# Altium PCB PCB_V1.PcbDoc
Units mm, origin at the board's own origin, x right, y up, seen from the top; angles counter-clockwise.
Board outline 80 x 47 mm, 2 copper layers (Top Layer, Bottom Layer), stack 1.991 mm thick; 66 components, 34 nets, 194 pads, 276 vias.
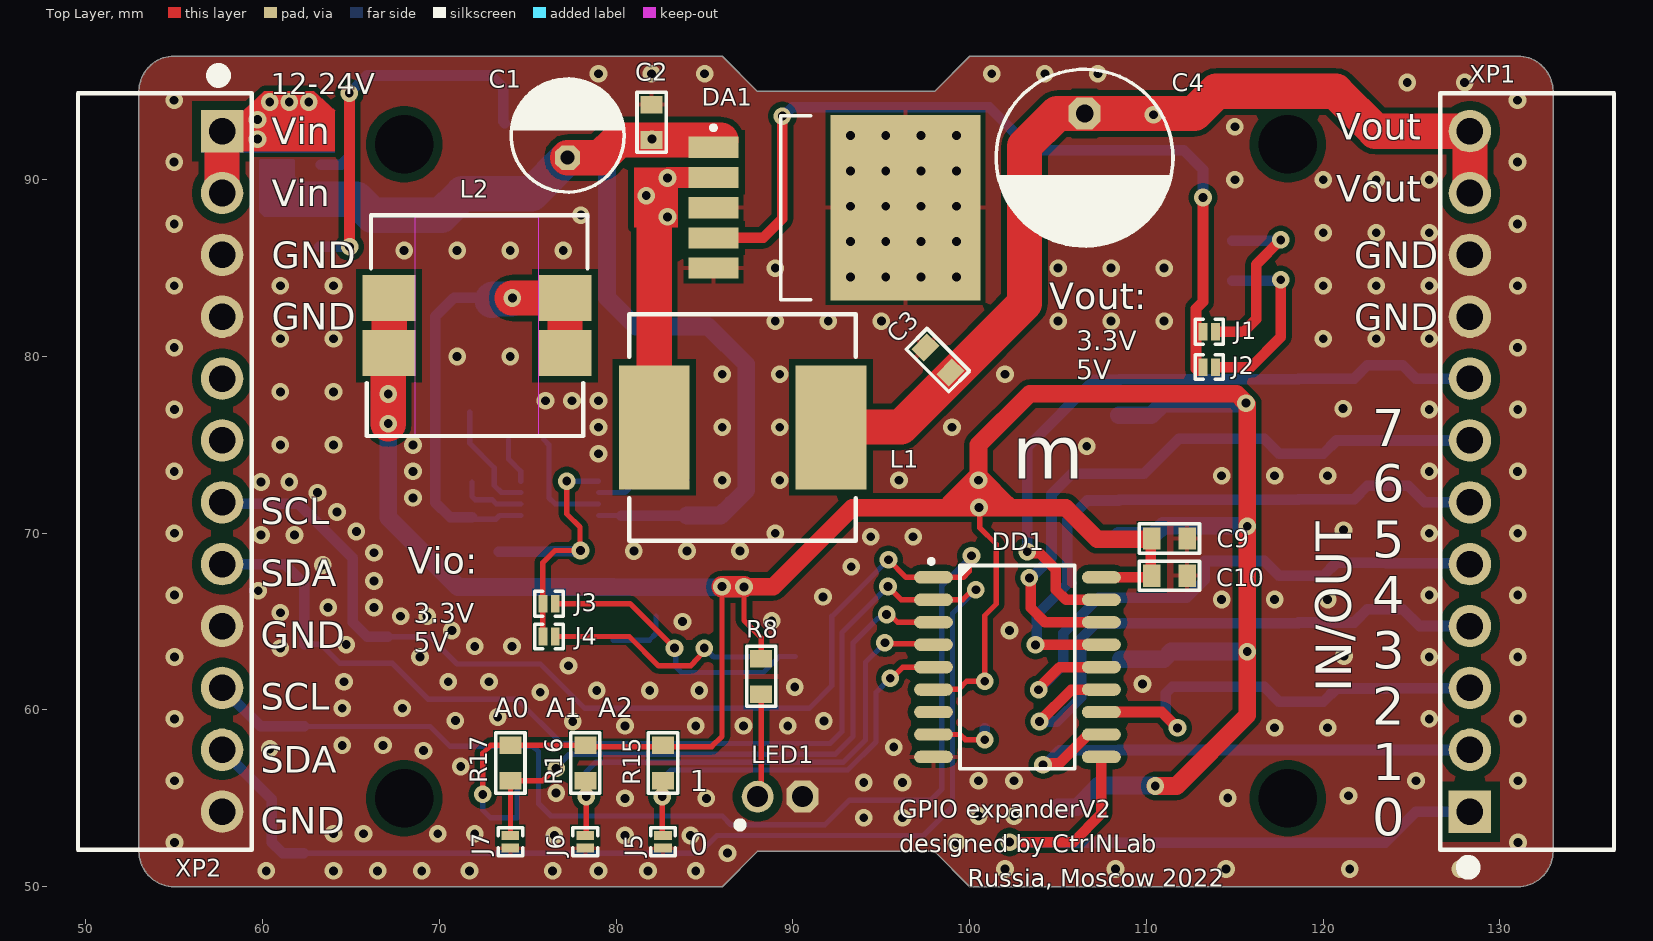
[diagram p0: Top Layer view]
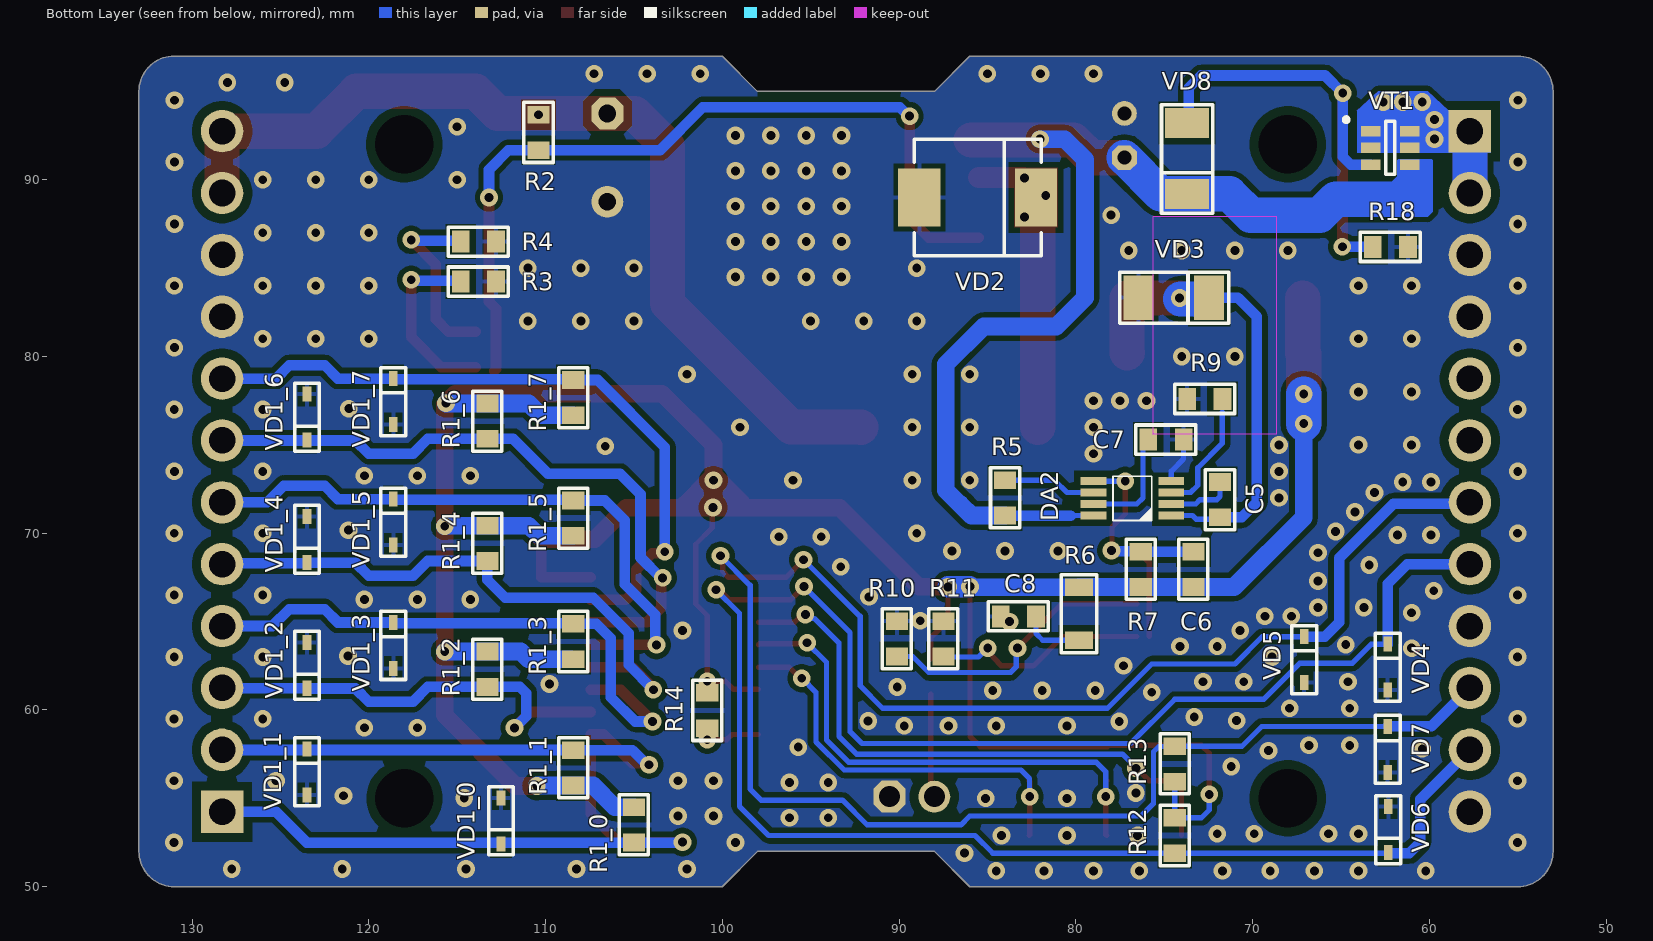
[diagram p1: Bottom Layer view, seen from below]
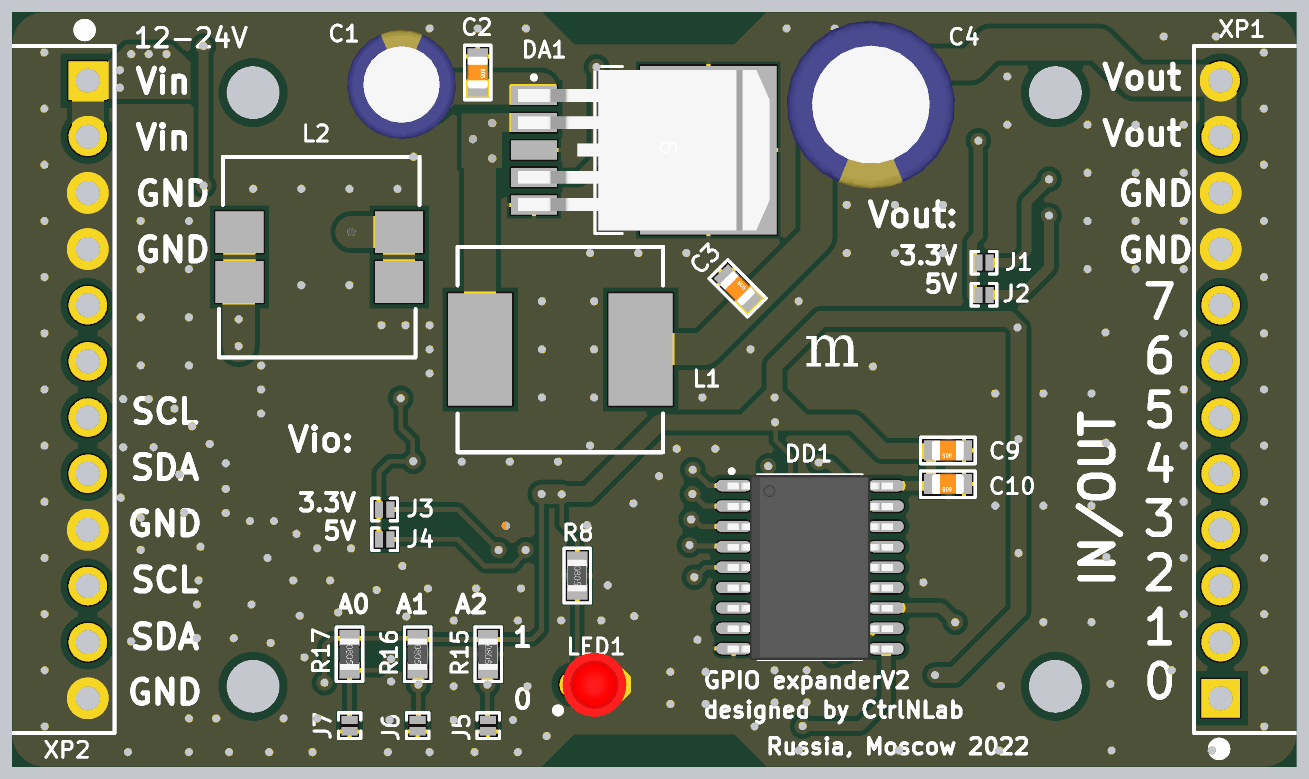
[diagram p2: 3D render of the assembled board from above, using the file's embedded part models]
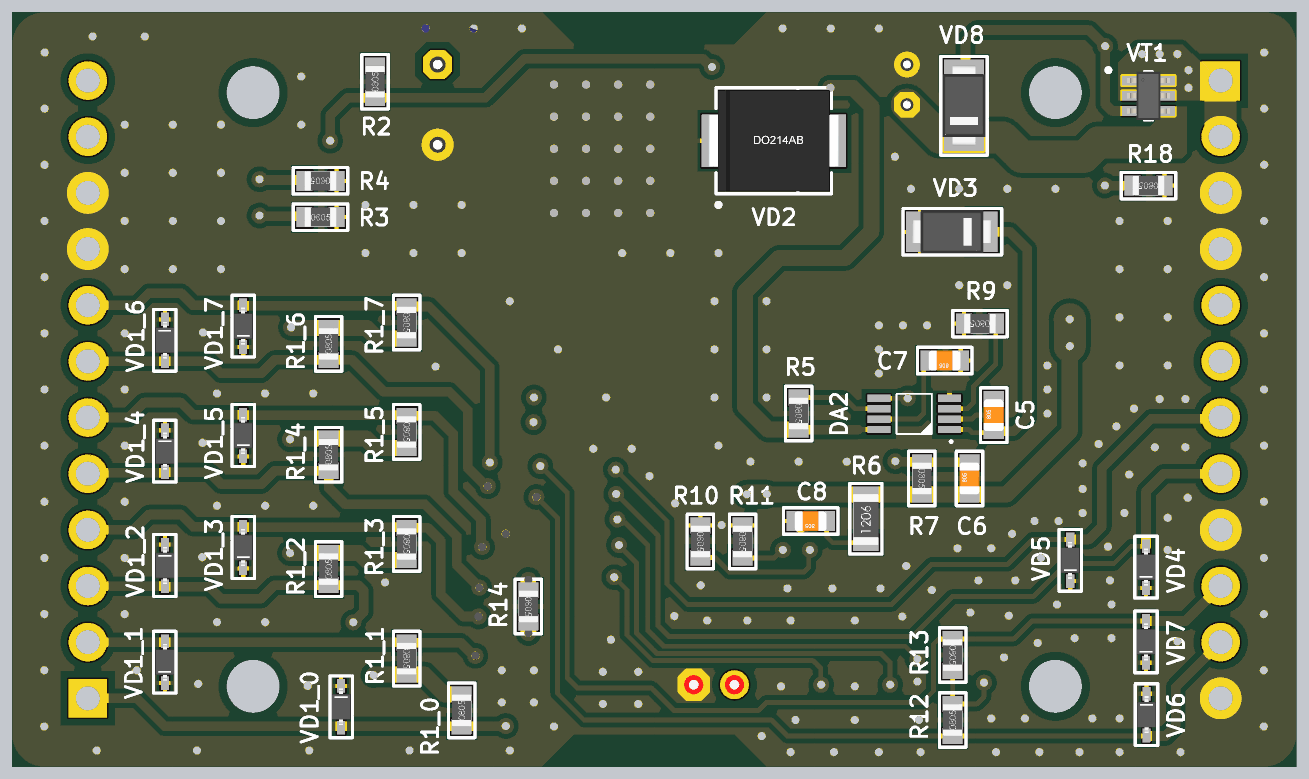
[diagram p3: 3D render of the assembled board from below, using the file's embedded part models]

## Layer stack, top to bottom
Top Solder: solder mask 0.0102, Solder Resist, Dk 3.5
Top Layer: signal copper 0.0356
Dielectric 1: dielectric 1.92, FR-4, Dk 4.8
Bottom Layer: signal copper 0.0356
Bottom Solder: solder mask 0.0102, Solder Resist, Dk 3.5

## Board outline
53,52 ccw(c55,52) 55,50 86,50 88,52 98,52 100,50 131,50 ccw(c131,52) 133,52 133,95 ccw(c131,95) 131,97 100,97 98,95 88,95 86,97 55,97 ccw(c55,95) 53,95

## Design rules (kind name [scope] priority, off if disabled: settings)
Clearance [All] p1: gap=0.35 ignorepadtopadclearanceinfootprint=FALSE except(0: Arc-Hole Track-Hole SMDPad-Hole THPad-Hole Via-Hole Fill-Hole Poly-Hole Region-Hole Text-Hole; 0.1: SMDPad-SMDPad; 0.15: Arc-Arc Arc-Track Arc-SMDPad Track-Track Track-SMDPad; 0.254: SMDPad-THPad THPad-THPad; 0.3: Arc-THPad Arc-Fill Arc-Poly Arc-Region Track-THPad Track-Fill Track-Poly Track-Region Via-Fill Via-Poly Via-Region Fill-Fill Fill-Poly Fill-Region Poly-Poly Poly-Region Region-Region; 0.5: THPad-Fill THPad-Poly THPad-Region)
PolygonConnect [All] p1: thpad.connectstyle=Direct thpad.reliefconductorwidth=0.254 thpad.reliefentries=4 thpad.polygonreliefangle="90 Angle" thpad.airgapwidth=0.254 smdpad.connectstyle=Relief smdpad.reliefconductorwidth=0.254 smdpad.reliefentries=4 smdpad.polygonreliefangle="90 Angle" smdpad.airgapwidth=0.254 via.connectstyle=Direct via.reliefconductorwidth=0.254 via.reliefentries=4 via.polygonreliefangle="90 Angle" via.airgapwidth=0.254
RoomDefinition 6 [InComponentClass('6')] p1: confinementstyle=ConfineIn formatcopy=TRUE lockcomponents=FALSE outline 107.3,73.83 125,73.83 125,78.8 107.3,78.8
RoomDefinition 5 [InComponentClass('5')] p2: confinementstyle=ConfineIn formatcopy=TRUE lockcomponents=FALSE outline 107.3,68.284 125,68.284 125,73.065 107.3,73.065
RoomDefinition 4 [InComponentClass('4')] p3: confinementstyle=ConfineIn formatcopy=TRUE lockcomponents=FALSE outline 107.3,66.922 125,66.922 125,71.891 107.3,71.891
RoomDefinition 7 [InComponentClass('7')] p4: confinementstyle=ConfineIn formatcopy=TRUE lockcomponents=FALSE outline 107.3,75.1 125,75.1 125,79.881 107.3,79.881
RoomDefinition 2 [InComponentClass('2')] p5: confinementstyle=ConfineIn formatcopy=TRUE lockcomponents=FALSE outline 107.3,59.795 125,59.795 125,64.765 107.3,64.765
RoomDefinition 1 [InComponentClass('1')] p6: confinementstyle=ConfineIn formatcopy=TRUE lockcomponents=FALSE outline 104,54 125,54 125,58.75 104,58.75
RoomDefinition 0 [InComponentClass('0')] p7: confinementstyle=ConfineIn formatcopy=TRUE lockcomponents=FALSE outline 104,50.788 125,50.788 125,58 104,58
RoomDefinition 3 [InComponentClass('3')] p8: confinementstyle=ConfineIn formatcopy=TRUE lockcomponents=FALSE outline 107.3,61.304 125,61.304 125,66.086 107.3,66.086
RoutingVias [All] p1: holewidth=0.2 width=0.5 viastyle="Through Hole" minholewidth=0.2 minwidth=0.5 maxholewidth=0.5 maxwidth=1
SolderMaskExpansion [All] p1: expansion=0.102 istentingtop=FALSE
Width [All] p1: maxlimit=2 minlimit=0.3 preferedwidth=0.6
30 further rules are at their usual default settings.

## Classes and differential pairs
channel class Channel: 0 1 2 3 4 5 6 7
component class Scheme: C1 C2 C3 C4 C5 C6 C7 C8 C9 C10 DA1 DA2 DD1 J1 J2 J3 J4 J5 J6 J7 L1 L2 LED1 R2 R3 R4 R5 R6 R7 R8 R9 R10 R11 R12 R13 R14 R15 R16 R17 R18 VD2 VD3 VD4 VD5 VD6 VD7 VD8 VT1 XP1 XP2
component class 7: R1_7 VD1_7
component class 6: R1_6 VD1_6
component class 5: R1_5 VD1_5
component class 4: R1_4 VD1_4
component class 3: R1_3 VD1_3
component class 2: R1_2 VD1_2
component class 1: R1_1 VD1_1
component class 0: R1_0 VD1_0

## Components (designator, comment, footprint, x,y, rotation, side; value= is the part's Value field where it differs from the comment)
C1 "Aluminium capacitor, 100мкФ, 35V, ±20%, 54mOhm, 14x10x5 mm, -55...+105°C" "CAP: D6.3C2.5H11" 77.25,92.5 r90 top value=100мкФ
C2 "Ceramic capacitor, 0.1мкФ, X7R, ±10%, 35V, 0805, -55...+125°C" "CAP: 0805" 82,93.25 r270 top value=0.1мкФ
C3 "Ceramic capacitor, 0.1мкФ, X7R, ±10%, 16V, 0805, -55...+125°C" "CAP: 0805" 98.2,79.8 r315 top value=0.1мкФ
C4 "Aluminium capacitor, 1000мкФ, 16V, ±20%, 54mOhm, 14x10x5 mm, -55...+105°C" "CAP: D10C5H16" 106.5,91.25 r270 top value=1000мкФ
C5 "Ceramic capacitor, 10нФ, X7R, ±10%, 50V, 0805, -55...+125°C" "CAP: 0805" 71.842,71.9 r90 bottom value=10нФ
C6 "Ceramic capacitor, 18нФ, X7R, ±10%, 50V, 0805, -55...+125°C" "CAP: 0805" 73.35,67.955 r90 bottom value=18нФ
C7 "Ceramic capacitor, 1мкФ, X7R, ±10%, 35V, 0805, -55...+125°C" "CAP: 0805" 74.9,75.3 r0 bottom value=1мкФ
C8 "Ceramic capacitor, 10мкФ, X7R, ±10%, 10V, 0805, -55...+125°C" "CAP: 0805" 83.25,65.3 r0 bottom value=10мкФ
C9 "Ceramic capacitor, 10мкФ, X7R, ±10%, 16V, 0805, -55...+125°C" "CAP: 0805" 111.3,69.7 r180 top value=10мкФ
C10 "Ceramic capacitor, 0.1мкФ, X7R, ±10%, 16V, 0805, -55...+125°C" "CAP: 0805" 111.3,67.596 r180 top value=0.1мкФ
DA1 "LM2596HVGR-ADJ" to-263-5l 91.8,88.42 r0 top
DA2 "LM5007MM/NOPB" 8-VSSOP_EDIT 76.8,71.975 r0 bottom
DD1 "MCP23008-E/SO" 18-SOIC 102.7,62.425 r0 top
J1 "" "CON: JUMPER x1" 113.2,81.4 r0 top
J2 "" "CON: JUMPER x1" 113.2,79.4 r0 top
J3 "" "CON: JUMPER x1" 75.85,66.016 r0 top
J4 "" "CON: JUMPER x1" 75.85,64.162 r0 top
J5 "" "CON: JUMPER x1" 82.65,52.9 r270 top
J6 "" "CON: JUMPER x1" 78.253,52.9 r270 top
J7 "" "CON: JUMPER x1" 74.013,52.9 r270 top
L1 "Fixed inductor, 33мкГн, ±20%, 0805, 100mA, -55...+125°C" SRR1208-330YL 87.15,75.989 r180 top value=33мкГн
L2 "Fixed inductor, 180мкГн, 0.9A, ±20%, 0805, 100mA, -55...+125°C" CDRH125NP-181MC 72.125,81.75 r90 top value="180мкГн, 0.9A"
LED1 "1224HRC-5" 1224HRC5 89.27,55.1 r180 top
R1_0 "Resistor film, 1К, ±5%, 0805, 0.125W, -55...+125°C" "RES: 0805"#1 105,53.5 r90 bottom value=1К (schematic designator R1)
R1_1 "Resistor film, 1К, ±5%, 0805, 0.125W, -55...+125°C" "RES: 0805"#1 108.43,56.725 r270 bottom value=1К (schematic designator R1)
R1_2 "Resistor film, 1К, ±5%, 0805, 0.125W, -55...+125°C" "RES: 0805"#1 113.294,62.306 r90 bottom value=1К (schematic designator R1)
R1_3 "Resistor film, 1К, ±5%, 0805, 0.125W, -55...+125°C" "RES: 0805"#1 108.43,63.874 r270 bottom value=1К (schematic designator R1)
R1_4 "Resistor film, 1К, ±5%, 0805, 0.125W, -55...+125°C" "RES: 0805"#1 113.294,69.433 r90 bottom value=1К (schematic designator R1)
R1_5 "Resistor film, 1К, ±5%, 0805, 0.125W, -55...+125°C" "RES: 0805"#1 108.43,70.854 r270 bottom value=1К (schematic designator R1)
R1_6 "Resistor film, 1К, ±5%, 0805, 0.125W, -55...+125°C" "RES: 0805"#1 113.294,76.341 r90 bottom value=1К (schematic designator R1)
R1_7 "Resistor film, 1К, ±5%, 0805, 0.125W, -55...+125°C" "RES: 0805"#1 108.43,77.67 r270 bottom value=1К (schematic designator R1)
R2 "Resistor film, 3K74, ±5%, 0805, 0.125W, -55...+125°C" "RES: 0805"#2 110.4,92.675 r90 bottom value=3K74
R3 "Resistor film, 2K2, ±5%, 0805, 0.125W, -55...+125°C" "RES: 0805"#1 113.8,84.238 r180 bottom value=2K2
R4 "Resistor film, 1K21, ±5%, 0805, 0.125W, -55...+125°C" "RES: 0805"#1 113.8,86.5 r0 bottom value=1K21
R5 "Resistor film, 249K, ±5%, 0805, 0.125W, -55...+125°C" "RES: 0805"#1 84,72 r270 bottom value=249K
R6 "RC1206FR-070R33L" "RES: 1206" 79.813,65.443 r90 bottom value=330мОм
R7 "Resistor film, 1K, ±5%, 0805, 0.125W, -55...+125°C" "RES: 0805"#1 76.325,67.955 r270 bottom value=1K
R8 "Resistor film, 560, ±5%, 0805, 0.125W, -55...+125°C" "RES: 0805"#1 88.2,61.9 r270 top value=560
R9 "Resistor film, 133K, ±5%, 0805, 0.125W, -55...+125°C" "RES: 0805"#1 72.7,77.6 r0 bottom value=133K
R10 "Resistor film, 1K, ±5%, 0805, 0.125W, -55...+125°C" "RES: 0805"#1 90.125,64.025 r270 bottom value=1K
R11 "Resistor film, 3K12, ±5%, 0805, 0.125W, -55...+125°C" "RES: 0805"#1 87.492,64.025 r270 bottom value=3K12
R12 "Resistor film, 1К, ±5%, 0805, 0.125W, -55...+125°C" "RES: 0805"#1 74.4,52.9 r90 bottom value=1К
R13 "Resistor film, 1К, ±5%, 0805, 0.125W, -55...+125°C" "RES: 0805"#1 74.4,56.949 r270 bottom value=1К
R14 "Resistor film, 4К7, ±5%, 0805, 0.125W, -55...+125°C" "RES: 0805"#1 100.85,59.975 r270 bottom value=4К7
R15 "Resistor film, 4К7, ±5%, 0805, 0.125W, -55...+125°C" "RES: 0805"#1 82.65,57 r270 top value=4К7
R16 "Resistor film, 4К7, ±5%, 0805, 0.125W, -55...+125°C" "RES: 0805"#1 78.253,57 r270 top value=4К7
R17 "Resistor film, 4К7, ±5%, 0805, 0.125W, -55...+125°C" "RES: 0805"#1 74.013,57 r270 top value=4К7
R18 "Resistor film, 100K, ±5%, 0805, 0.125W, -55...+125°C" "RES: 0805"#1 62.2,86.2 r0 bottom value=100K
VD1_0 "Schottky diode, 80V, 500mA, 1V, 15pF, SOD-123, -55...+150°C" "DIODE: SOD323" 112.514,53.725 r270 bottom (schematic designator VD1)
VD1_1 "Schottky diode, 80V, 500mA, 1V, 15pF, SOD-123, -55...+150°C" "DIODE: SOD323" 123.501,56.5 r90 bottom (schematic designator VD1)
VD1_2 "Schottky diode, 80V, 500mA, 1V, 15pF, SOD-123, -55...+150°C" "DIODE: SOD323" 123.501,62.531 r270 bottom (schematic designator VD1)
VD1_3 "Schottky diode, 80V, 500mA, 1V, 15pF, SOD-123, -55...+150°C" "DIODE: SOD323" 118.615,63.649 r90 bottom (schematic designator VD1)
VD1_4 "Schottky diode, 80V, 500mA, 1V, 15pF, SOD-123, -55...+150°C" "DIODE: SOD323" 123.501,69.658 r270 bottom (schematic designator VD1)
VD1_5 "Schottky diode, 80V, 500mA, 1V, 15pF, SOD-123, -55...+150°C" "DIODE: SOD323" 118.615,70.629 r90 bottom (schematic designator VD1)
VD1_6 "Schottky diode, 80V, 500mA, 1V, 15pF, SOD-123, -55...+150°C" "DIODE: SOD323" 123.501,76.566 r270 bottom (schematic designator VD1)
VD1_7 "Schottky diode, 80V, 500mA, 1V, 15pF, SOD-123, -55...+150°C" "DIODE: SOD323" 118.615,77.445 r90 bottom (schematic designator VD1)
VD2 "Schottky diode, 80V, 500mA, 1V, 15pF, SOD-123, -55...+150°C" "DIODE: SMC" 85.55,89 r180 bottom
VD3 "Schottky diode, 80V, 500mA, 1V, 15pF, SOD-123, -55...+150°C" "DIODE: SMA" 74.45,83.325 r180 bottom
VD4 "Schottky diode, 80V, 500mA, 1V, 15pF, SOD-123, -55...+150°C" "DIODE: SOD323" 62.35,62.425 r90 bottom
VD5 "Schottky diode, 80V, 500mA, 1V, 15pF, SOD-123, -55...+150°C" "DIODE: SOD323" 67.075,62.85 r90 bottom
VD6 "Schottky diode, 80V, 500mA, 1V, 15pF, SOD-123, -55...+150°C" "DIODE: SOD323" 62.321,53.236 r270 bottom
VD7 "Schottky diode, 80V, 500mA, 1V, 15pF, SOD-123, -55...+150°C" "DIODE: SOD323" 62.35,57.769 r90 bottom
VD8 "Single diode, 75V, 150mA, 1V, 4ns, SOD-323, -55...+150°C" "DIODE: SMA" 73.7,91.2 r270 bottom
VT1 "IRFTS9342TRPBF" 6-TSOP 62.2,91.8 r270 bottom
XP1 "15EDGRC-3.5-12P-14-00A(H)" 15EDGRC-3.5-12P-14-00A(H) 128.3,73.5 r90 top locked
XP2 "15EDGRC-3.5-12P-14-00A(H)" 15EDGRC-3.5-12P-14-00A(H) 57.7,73.5 r270 top locked

## Footprints (in the part's own frame and the unit in brackets; to place one, negate y for a bottom-side part, rotate by r counter-clockwise, add the part's x,y. Pads: shape width x height; smd on the part's side, far side on the other; paste and mask are expansions set on the pad)
6-TSOP [mm] "pitch 0.95 mm"
  rect 0.6x1.1 smd: 1(-0.95,-1.1) 2(0,-1.1) 3(0.95,-1.1) 4(0.95,1.1) 5(0,1.1) 6(-0.95,1.1)
  round 0.5 on Mech1: 7(-1.1,-0.9)
  silkscreen extent -1.72,-2.63 1.5,0.25, body extent -1.5,-1.35 1.5,1.35, height 1
8-VSSOP_EDIT [mm]
  rect 1.45x0.45 smd: 1(-2.2,0.975) 2(-2.2,0.325) 3(-2.2,-0.325) 4(-2.2,-0.975) 5(2.2,-0.975) 6(2.2,-0.325) 7(2.2,0.325) 8(2.2,0.975)
  round 0.3 on Bottom Overlay: ""(-2.3,1.725)
  silkscreen extent -1.1,-1.25 1.1,1.25
15EDGRC-3.5-12P-14-00A(H) [mm] "Connector"
  rect 2.4x2.4 hole 1.5: 1(-19.25,0)
  round 2.4 hole 1.5: 2(-15.75,0) 3(-12.25,0) 4(-8.75,0) 5(-5.25,0) 6(-1.75,0) 7(1.75,0) 8(5.25,0) 9(8.75,0) 10(12.25,0) 11(15.75,0) 12(19.25,0)
  silkscreen extent -22.7,-8.15 21.4,1.68
18-SOIC [mm] "pitch 1.27 mm"
  oval 2.2x0.7 smd: 1(-4.75,5.08) 2(-4.75,3.81) 3(-4.75,2.54) 4(-4.75,1.27) 5(-4.75,0) 6(-4.75,-1.27) 7(-4.75,-2.54) 8(-4.75,-3.81) 9(-4.75,-5.08) 10(4.75,-5.08) 11(4.75,-3.81) 12(4.75,-2.54) 13(4.75,-1.27) 14(4.75,0) 15(4.75,1.27) 16(4.75,2.54) 17(4.75,3.81) 18(4.75,5.08)
  round 0.7 on Mech1: 32(-4.5,5.1)
  silkscreen extent -5,-5.75 3.25,6.11, body extent -5.12,-5.79 5.18,5.74, height 2.65
1224HRC5 [mm]
  oct 1.8x1.8 hole 1.2: 1(-1.27,0)
  round 1.8 hole 1.2: 2(1.27,0)
  body extent -2,-2 2,2, height 12
"CAP: 0805" [mm]
  rect 1x1.25 smd: 1(-1,0) 2(1,0)
  silkscreen extent -1.7,-0.82 1.7,0.82, body extent -1,-0.62 1,0.63, height 0.78
"CAP: D6.3C2.5H11" [mm]
  oct 1.4x1.4 hole 0.8: 1(-1.25,0)
  round 1.4 hole 0.8 mask+0.102: 2(1.25,0)
  silkscreen extent -3.2,-3.2 3.2,3.2, body extent -3.4,-3.4 3.4,3.4, height 12.5
"CAP: D10C5H16" [mm]
  oct 1.8x1.8 hole 1: 1(-2.5,0)
  round 1.8 hole 1: 2(2.5,0)
  silkscreen extent -5,-5 5,5, body extent -5.25,-5.25 5.25,5.25, height 17.55
CDRH125NP-181MC [mm]
  rect 2.6x3 smd: 1(-1.55,4.975) 1(1.55,4.975) 2(-1.55,-4.975) 2(1.55,-4.975)
  Keep-Out Layer lines w0.05: -6.15,3.5 6.15,3.5 6.15,-3.5 -6.15,-3.5 -6.15,3.5
  silkscreen extent -6.25,-6.25 6.25,6.25
"CON: JUMPER x1" [mm]
  rect 0.5x1 smd: 1(0,0) 2(0.7,0)
  silkscreen extent -0.45,-0.7 1.15,0.7
"DIODE: SMA" [mm]
  rect 1.7x2.5 smd: 1(-2,0) 2(2,0)
  round 0.5 on Mech1: ""(2,0.9)
  silkscreen extent -3.05,-1.45 3.1,1.45, body extent -2.5,-1.35 2.5,1.35, height 2.28
"DIODE: SMC" [mm]
  rect 2.4x3.3 smd: 1(-3.3,0) 2(3.3,0)
  silkscreen extent -3.6,-3.3 3.6,3.3, body extent -4.06,-3.15 4.06,3.15, height 2.67
"DIODE: SOD323" [mm]
  rect 0.85x0.5 smd: 1(-1.3,0) 2(1.3,0)
  silkscreen extent -1.92,-0.7 1.92,0.7, body extent -1.15,-0.6 1.15,0.6, height 1.04
"RES: 0805"#1 [mm]
  rect 1x1.25 smd: 1(-1,0) 2(1,0)
  silkscreen extent -1.7,-0.82 1.7,0.82, body extent -1,-0.6 1,0.6, height 0.44
"RES: 0805"#2 [mm]
  rect 1x1.25 smd: 1(-1,0)
  rect 1x1.25 smd mask+0.102: 2(1,0)
  silkscreen extent -1.7,-0.82 1.7,0.82, body extent -1,-0.6 1,0.6, height 0.44
"RES: 1206" [mm]
  rect 1x1.6 smd: 1(-1.5,0) 2(1.5,0)
  silkscreen extent -2.2,-1 2.2,1, body extent -1.65,-0.8 1.55,0.8, height 0.47
SRR1208-330YL [mm] "Inductor"
  rect 4x7 smd: 1(-5,0) 2(5,0)
  silkscreen extent -6.4,-6.4 6.4,6.4
to-263-5l [mm]
  rect 2.85x1.2 smd: 1(-6.3,3.42) 2(-6.3,1.71) 3(-6.3,0) 4(-6.3,-1.71) 5(-6.3,-3.42)
  rect 8.5x10.5 smd: 3(4.572,0)
  round 0.5 on Mech1: ""(-6.7,4.4)
  silkscreen extent -6.42,-5.2 -0.8,5.2, body extent -7.28,-5 8.39,5, height 4.93

## Part data
C1: library part Aluminium, Manufacturer=Wurth, Package="14x10x5 mm", PartNumber=860080475013, Temperature=-55...+105°C, Tolerance=±20%, TypeCapacitor="Aluminium capacitor", Voltage=35V, HelpURL=https://www.digikey.com/product-detail/en/wurth-electronics-inc/860080475013/732-9029-1-ND/5728972, Impedance=54mOhm, ValueManufacturerPartNumber="Aluminium capacitor, 100мкФ, 35V, ±20%, 54mOhm, 14x10x5 mm, -55...+105°C"
C2 C7: library part Ceramic_0805, Manufacturer=Yageo, Package=0805, PartNumber=CC0805KRX7R7BB104, Temperature=-55...+125°C, Tolerance=±10%, TypeCapacitor="Ceramic capacitor", TypeDielectric=X7R, Voltage=35V, HelpURL=https://www.digikey.com/product-detail/en/yageo/CC0805KRX7R7BB104/311-1142-1-ND/303052
  C2: ValueManufacturerPartNumber="Ceramic capacitor, 0.1мкФ, X7R, ±10%, 35V, 0805, -55...+125°C"
  C7: ValueManufacturerPartNumber="Ceramic capacitor, 1мкФ, X7R, ±10%, 35V, 0805, -55...+125°C"
C3 C9 C10: library part Ceramic_0805, Manufacturer=Yageo, Package=0805, PartNumber=CC0805KRX7R7BB104, Temperature=-55...+125°C, Tolerance=±10%, TypeCapacitor="Ceramic capacitor", TypeDielectric=X7R, Voltage=16V, HelpURL=https://www.digikey.com/product-detail/en/yageo/CC0805KRX7R7BB104/311-1142-1-ND/303052
  C3 C10: ValueManufacturerPartNumber="Ceramic capacitor, 0.1мкФ, X7R, ±10%, 16V, 0805, -55...+125°C"
  C9: ValueManufacturerPartNumber="Ceramic capacitor, 10мкФ, X7R, ±10%, 16V, 0805, -55...+125°C"
C4: library part Aluminium, Manufacturer=Wurth, Package="14x10x5 mm", PartNumber=860080475013, Temperature=-55...+105°C, Tolerance=±20%, TypeCapacitor="Aluminium capacitor", Voltage=16V, HelpURL=https://www.digikey.com/product-detail/en/wurth-electronics-inc/860080475013/732-9029-1-ND/5728972, Impedance=54mOhm, ValueManufacturerPartNumber="Aluminium capacitor, 1000мкФ, 16V, ±20%, 54mOhm, 14x10x5 mm, -55...+105°C"
C5 C6: library part Ceramic_0805, Manufacturer=Yageo, Package=0805, PartNumber=CC0805KRX7R7BB104, Temperature=-55...+125°C, Tolerance=±10%, TypeCapacitor="Ceramic capacitor", TypeDielectric=X7R, Voltage=50V, HelpURL=https://www.digikey.com/product-detail/en/yageo/CC0805KRX7R7BB104/311-1142-1-ND/303052
  C5: ValueManufacturerPartNumber="Ceramic capacitor, 10нФ, X7R, ±10%, 50V, 0805, -55...+125°C"
  C6: ValueManufacturerPartNumber="Ceramic capacitor, 18нФ, X7R, ±10%, 50V, 0805, -55...+125°C"
C8: library part Ceramic_0805, Manufacturer=Yageo, Package=0805, PartNumber=CC0805KRX7R7BB104, Temperature=-55...+125°C, Tolerance=±10%, TypeCapacitor="Ceramic capacitor", TypeDielectric=X7R, Voltage=10V, HelpURL=https://www.digikey.com/product-detail/en/yageo/CC0805KRX7R7BB104/311-1142-1-ND/303052, ValueManufacturerPartNumber="Ceramic capacitor, 10мкФ, X7R, ±10%, 10V, 0805, -55...+125°C"
DA1: "Step-down DC-DC, 3A"
DA2: "Step-down DC-DC, 0.5A"
DD1: "Integrated Circuit"
J1 J2 J3 J4 J5 J6 J7: library part Jumper_single
  J1 J3: CommentText="Jmpr 5V"
  J2 J4: CommentText="Jmpr 3.3V"
  J5 J6 J7: CommentText=Jmpr
L1 L2: library part Inductor_0805, "https://www.chipdip.ru/product/srr1208-330yl", Manufacturer="Murata Electronics", MaxCurrent=100mA, Package=0805, PartNumber=LQM21FN100M70L, Temperature=-55...+125°C, Tolerance=±20%, TypeInductor="Fixed inductor", HelpURL=https://www.digikey.com/product-detail/en/murata-electronics-north-america/LQM21FN100M70L/490-4029-1-ND/1016289
  L1: ValueManufacturerPartNumber="Fixed inductor, 33мкГн, ±20%, 0805, 100mA, -55...+125°C"
  L2: ValueManufacturerPartNumber="Fixed inductor, 180мкГн, 0.9A, ±20%, 0805, 100mA, -55...+125°C"
LED1: "LED", Manufacturer_Name=Everlight, Datasheet Link=https://www.digchip.com/datasheets/parts/datasheet/158/1224HRC-5-pdf.php, Height=5.5mm, Manufacturer_Part_Number=1224HRC-5
R1_0 R1_1 R1_2 R1_3 R1_4 R1_5 R1_6 R1_7 R2 R3 R4 R5 R7 R8 R9 R10 R11 R12 R13 R14 R15 R16 R17 R18: library part Resistor_0805, Manufacturer=Yageo, Package=0805, PartNumber=RC0805JR-07100RL, Power=0.125W, Temperature=-55...+125°C, Tolerance=±5%, TypeResistor="Resistor film", HelpURL=https://www.digikey.com/product-detail/en/yageo/RC0805JR-07100RL/311-100ARCT-ND/731185
  R1_0 R1_1 R1_2 R1_3 R1_4 R1_5 R1_6 R1_7 R12 R13: ValueManufacturerPartNumber="Resistor film, 1К, ±5%, 0805, 0.125W, -55...+125°C"
  R2: ValueManufacturerPartNumber="Resistor film, 3K74, ±5%, 0805, 0.125W, -55...+125°C"
  R3: ValueManufacturerPartNumber="Resistor film, 2K2, ±5%, 0805, 0.125W, -55...+125°C"
  R4: ValueManufacturerPartNumber="Resistor film, 1K21, ±5%, 0805, 0.125W, -55...+125°C"
  R5: ValueManufacturerPartNumber="Resistor film, 249K, ±5%, 0805, 0.125W, -55...+125°C"
  R7 R10: ValueManufacturerPartNumber="Resistor film, 1K, ±5%, 0805, 0.125W, -55...+125°C"
  R8: ValueManufacturerPartNumber="Resistor film, 560, ±5%, 0805, 0.125W, -55...+125°C"
  R9: ValueManufacturerPartNumber="Resistor film, 133K, ±5%, 0805, 0.125W, -55...+125°C"
  R11: ValueManufacturerPartNumber="Resistor film, 3K12, ±5%, 0805, 0.125W, -55...+125°C"
  R14 R15 R16 R17: ValueManufacturerPartNumber="Resistor film, 4К7, ±5%, 0805, 0.125W, -55...+125°C"
  R18: ValueManufacturerPartNumber="Resistor film, 100K, ±5%, 0805, 0.125W, -55...+125°C"
R6: library part Resistor_1206, Manufacturer=Yageo, Package=1206, PartNumber=RC1206JR-07100RL, Power=0.25W, Temperature=-55...+125°C, Tolerance=±5%, TypeResistor="Resistor film", ValueManufacturerPartNumber="Resistor film, 330мОм, ±5%, 1206, 0.25W, -55...+125°C", HelpURL=https://www.digikey.com/product-detail/en/yageo/RC1206JR-07100RL/311-100ERCT-ND/732153
VD1_0 VD1_1 VD1_2 VD1_3 VD1_4 VD1_5 VD1_6 VD1_7: library part Schottky_single, "https://www.chipdip.ru/product/srr1208-330yl", Current=500mA, Manufacturer="Diodes Incorporated", Package=SOD-123, PartNumber=PESD5V0L1BA,115, Temperature=-55...+150°C, Voltage=80V, VoltageDrop=1V, HelpURL=https://www.digikey.com/product-detail/en/diodes-incorporated/MBR0580S1-7/MBR0580S1-7DICT-ND/5080371, RecoveryTime=15pF, TypeDiode="Schottky diode", ValueManufacturerPartNumber="Schottky diode, 80V, 500mA, 1V, 15pF, SOD-123, -55...+150°C"
VD2: library part Schottky_single, "https://www.chipdip.ru/product/srr1208-330yl", Current=500mA, Manufacturer="Diodes Incorporated", Package=SOD-123, PartNumber=SS34, Temperature=-55...+150°C, Voltage=80V, VoltageDrop=1V, HelpURL=https://www.digikey.com/product-detail/en/diodes-incorporated/MBR0580S1-7/MBR0580S1-7DICT-ND/5080371, RecoveryTime=15pF, TypeDiode="Schottky diode", ValueManufacturerPartNumber="Schottky diode, 80V, 500mA, 1V, 15pF, SOD-123, -55...+150°C"
VD3: library part Schottky_single, "https://www.chipdip.ru/product/srr1208-330yl", Current=500mA, Manufacturer="Diodes Incorporated", Package=SOD-123, PartNumber=SS14, Temperature=-55...+150°C, Voltage=80V, VoltageDrop=1V, HelpURL=https://www.digikey.com/product-detail/en/diodes-incorporated/MBR0580S1-7/MBR0580S1-7DICT-ND/5080371, RecoveryTime=15pF, TypeDiode="Schottky diode", ValueManufacturerPartNumber="Schottky diode, 80V, 500mA, 1V, 15pF, SOD-123, -55...+150°C"
VD4 VD5 VD6 VD7: library part Schottky_single, Current=500mA, Manufacturer="Diodes Incorporated", Package=SOD-123, PartNumber=PESD5V0L1BA,115, Temperature=-55...+150°C, Voltage=80V, VoltageDrop=1V, HelpURL=https://www.digikey.com/product-detail/en/diodes-incorporated/MBR0580S1-7/MBR0580S1-7DICT-ND/5080371, RecoveryTime=15pF, TypeDiode="Schottky diode", ValueManufacturerPartNumber="Schottky diode, 80V, 500mA, 1V, 15pF, SOD-123, -55...+150°C"
VD8: library part Diode_single, Current=150mA, Manufacturer="Micro Commercial", Package=SOD-323, PartNumber=M1, Temperature=-55...+150°C, Voltage=75V, VoltageDrop=1V, HelpURL=https://www.digikey.com/product-detail/en/micro-commercial-co/1N4148WX-TP/1N4148WXTPMSCT-ND/717312, RecoveryTime=4ns, TypeDiode="Single diode", ValueManufacturerPartNumber="Single diode, 75V, 150mA, 1V, 4ns, SOD-323, -55...+150°C"
VT1: "Транзистор, Р-канал 30В 5.9А"
XP1 XP2: "12 pin, 3.5mm"

## Free pads (board coordinates)
  round 0 hole 3.3 unplated: 1(68,55) 1(68,92) 1(118,55) 1(118,92)

## Via types
v1: diameter 1, hole 0.5, Top Layer to Bottom Layer, tented both sides, 248 vias
v2: diameter 1, hole 0.5, Top Layer to Bottom Layer, tented bottom, 22 vias
v3: diameter 1, hole 0.5, Top Layer to Bottom Layer, tented top, 6 vias

## Nets (pads, with @x,y where several pads share a name; then routed paths per layer and width w, separated by ;. In a path a pad name is that pad's centre, name@x,y a point inside that pad or via, vN(x,y) a via of type N, cw(c..) or ccw(c..) an arc to the next point about the centre after c; other vN are vias at no path point)
A0: DD1.5 J5.1 R15.2 | length 23.8
  Top Layer w0.3: J5.1 82.6,52.95 82.6,55.95 R15.2 ; v1(95.5,61.8) 95.594,61.8 96.219,62.425 DD1.5
  Bottom Layer w0.3: v2(82.6,55.1) 82.622,55.122 82.622,56.122 83.1,56.6 93.1,56.6 94.7,58.2 94.7,61 v1(95.5,61.8)
A1: DD1.4 J6.1 R16.2 | length 29.8
  Top Layer w0.3: J6.1 78.3,52.947 78.3,55.953 R16.2 ; v1(95.2,63.8) 95.252,63.748 97.897,63.748 DD1.4
  Bottom Layer w0.3: v2(78.3,55.1) 78.3,56.5 78.85,57.05 92.85,57.05 94.1,58.3 94.1,62.7 v1(95.2,63.8)
A2: DD1.3 J7.1 R17.2 | length 34.2
  Top Layer w0.3: J7.1 R17.2 75.856,56 76.556,56.7 v1(76.6,56.7) ; v1(95.3,65.4) 95.489,65.4 95.924,64.965 DD1.3
  Bottom Layer w0.3: v1(76.6,56.7) 76.6,56.744 77.356,57.5 92.4,57.5 93.4,58.5 93.4,63.8 94.778,65.178 94.889,65.178 95.111,65.4 v1(95.3,65.4)
GND: C1.2 C2.1 C3.1 C4.2 C7.1 C8.2 C9.1 C10.1 DA1.3 DA1.5 DA2.4 DD1.9 J5.2 J6.2 J7.2 LED1.1 R3.2 R4.1 R9.2 R10.1 R11.1 R18.1 VD1_0.1 VD1_1.1 VD1_2.1 VD1_3.1 VD1_4.1 VD1_5.1 VD1_6.1 VD1_7.1 VD2.1 VD3.1 VD4.1 VD5.1 VD6.1 VD7.1 XP1.9 XP1.10 XP2.3 XP2.4 XP2.9 XP2.12 | length 2.6
  Bottom Layer w0.3: C7.1 73.9,74.2 74.6,73.5 DA2.4
  other v1: 60.2,50.9 64,50.9 66.5,50.9 69,50.9 71.7,50.9 76.4,50.9 79,50.9 81.8,50.9 84.5,50.9 102,51 108.25,51 114.5,51 121.5,51 127.75,51 86.3,51.9 55.013,52.5 99.25,52.5 131.016,52.5 76.5,52.9 80.5,52.9 84.2,52.9 64,53 65.7,53 69.9,53 72,53 94,53.9 96.2,53.9 100.5,54 102.5,54 80.5,55 85.1,55 114.6,55.025 121.425,55.15 76.6,55.3 94,55.9 96.2,55.9 55.011,56 100.5,56 102.5,56 125.25,56 131.013,56 71.2,56.8 69.1,57.7 60.4,57.8 95.7,57.9 64.5,58 66.8,58 117.25,59 120.25,59 80.5,59.1 84.5,59.1 87.2,59.1 89.7,59.1 77.543,59.346 91.75,59.375 70.9,59.4 55.008,59.5 126,59.5 131.011,59.5 73.3,59.6 64.5,60.1 67.9,60.1 75.7,61 78.9,61.1 81.9,61.1 84.7,61.1 90.1,61.3 109.775,61.475 64.6,61.6 70.5,61.6 72.8,61.6 77.3,62.5 55.005,63 68.9,63 126,63 131.008,63 121.175,63.05 61,63.5 72,63.6 74.1,63.6 64.725,63.7 70.7,64.5 102.25,64.5 83.75,65 88.8,65.05 67.8,65.3 69.3,65.3 61,65.5 63.7,65.8 66.3,65.8 114.25,66.25 117.25,66.25 120.25,66.25 91.7,66.4 55.003,66.5 126,66.5 131.005,66.5 59.75,66.75 66.3,67.3 93.3,68.1 63.4,68.2 66.3,68.9 81,69 84,69 87,69 94.4,69.8 96.8,69.8 59.9,69.9 61.8,69.9 55,70 89,70 126,70 131.003,70 65.3,70.1 121.15,70.175 64.2,71.2 68.5,72 63.1,72.3 59.9,72.9 61.5,72.9 86,73 89.25,73 96,73 114.25,73.25 117.25,73.25 120.25,73.25 54.997,73.5 68.5,73.5 126,73.5 131,73.5 79,74.5 106.625,74.925 61,75 64,75 68.505,74.996 79,76 86,76 89.25,76 99,76 55,77 126,77 131.003,77 121.125,77.05 76,77.5 77.5,77.5 79,77.5 61,78 64,78 86,79 89.25,79 102,79 71,80 74,80 54.997,80.5 131,80.5 61,81 64,81 120,81 123,81 126,81 89,82 92,82 95,82 105,82 108,82 111,82 54.995,84 61,84 64,84 120,84 123,84 126,84 130.997,84 89,85 105,85 108,85 111,85 68,86 71,86 74,86 77,86 120,87 123,87 126,87 54.992,87.5 130.995,87.5 78,88 115,90 120,90 123,90 126,90 54.989,91 130.992,91 115,93 54.987,94.5 130.989,94.5 124.75,95.5 128,95.5 79,96 82,96 85,96 101.25,96 104.25,96 107.25,96
  other v2: 93.25,84.5 95.25,84.5 97.25,84.5 99.25,84.5 93.25,86.5 95.25,86.5 97.25,86.5 99.25,86.5 93.25,88.5 95.25,88.5 97.25,88.5 99.25,88.5 93.25,90.5 95.25,90.5 97.25,90.5 99.25,90.5 93.25,92.5 95.25,92.5 97.25,92.5 99.25,92.5
NetC1_1: C1.1 C2.2 DA1.1 DA2.8 R5.2 VD8.2 VT1.4 | length 63.2
  Top Layer w2: C1.1 79.125,91.25 80.125,92.25 C2.2 DA1.1@85.923,92.25
  Bottom Layer w0.3: DA2.8 80.3,71
  Bottom Layer w0.6: 80.3,71 R5.2@83.9,71
  Bottom Layer w1: v1(82.025,92.3) 80.625,92.3 79.475,91.15 79.475,83.325 81.1,81.7 85.209,81.7 87.35,79.559 87.35,72.441 86.559,71.65 86.55,71.65 85.9,71 R5.2
  Bottom Layer w2: 61.1,88.9 65.3,88.9 66.2,88 70.1,88 71.3,89.2 75.2,89.2 C1.1
NetC5_1: C5.1 DA2.1 L2.2 VD3.2 | length 26.8
  Top Layer w2: v1(74.124,83.312) L2.2@77.088,83.312 ; L2.2@77.088,80.212 77.1,80.2 L2.2@77.1,83.3
  Bottom Layer w0.3: C5.1 71.942,70.8 73.2,70.8 73.4,71 DA2.1
  Bottom Layer w0.6: C5.1 70.6,70.9 69.75,71.75 69.75,82.25 70.825,83.325 VD3.2 72.45,83.208 72.474,83.185 VD3.2@72.968,83.185
  Bottom Layer w2: VD3.2@72.968,83.185 73.037,83.253 v1@74.066,83.253
NetC5_2: C5.2 DA2.2 | length 3.8
  Bottom Layer w0.3: C5.2 71.842,72.076 72.018,71.9 72.964,71.9 73.214,71.65 DA2.2
NetC6_2: C6.2 DA2.5 J3.1 J4.1 R7.1 | length 17.3
  Top Layer w0.3: J4.1 75.85,68.35 76.525,69.025 v1(77.975,69.025) 77.953,69.047 77.953,70.347 77.2,71.1 v1(77.2,72.95)
  Bottom Layer w0.3: v1(77.2,72.95) DA2.5
  Bottom Layer w0.6: C6.2 R7.1 76.36,68.99 77.94,68.99 v1(77.975,69.025)
NetC7_2: C7.2 DA2.7 | length 6.4
  Bottom Layer w0.3: C7.2 76.2,75 76.2,72 76.55,71.65 DA2.7
NetC8_1: C8.1 R6.1 | length 3.6
  Bottom Layer w0.3: R6.1 81.868,63.943 82.25,64.325 C8.1
NetDA1_2: DA1.2 L1.2 VD2.2 | length 20.1
  Top Layer w1.2: v3(82.9,87.9) v3(82.9,90.1) 82.93,90.13 DA1.2
  Top Layer w2: 82,88.3 82.15,88.45 ; L1.2 82.15,88.45 ; 82.15,88.65 82.15,88.45 ; 82.2,88.6 82.2,88.5 82.15,88.45
  Bottom Layer w0.6: v3(82.9,87.9) v3(82.9,90.1)
  other v3: 81.7,89.1
NetDA1_4: DA1.4 J1.1 J2.1 R2.1 | length 47.2
  Top Layer w0.6: DA1.4 88.31,86.71 89.4,87.8 v1(89.4,93.6) ; 112.9,79.2 112.8,79.3 112.8,82.7 113.2,83.1 v1(113.2,89)
  Bottom Layer w0.6: v1(89.4,93.6) 89.451,93.6 89.951,94.1 101.1,94.1 103.525,91.675 R2.1 112.1,91.675 113.2,90.575 v1(113.2,89)
NetDA2_3: DA2.3 R9.1 | length 6.4
  Bottom Layer w0.3: 71.717,76.864 71.717,75.083 73.1,73.7 73.1,72.7 73.5,72.3 DA2.3
NetDA2_6: DA2.6 R5.1 | length 5.3
  Bottom Layer w0.3: DA2.6 80.5,72.3 81.2,73 R5.1
NetDD1_8: DD1.8 R14.2 | length 3.7
  Top Layer w0.3: DD1.8 99.455,58.615 99.75,58.32 v3(100.846,58.32)
  Bottom Layer w0.6: v3(100.846,58.32) 100.848,58.323 100.848,58.973 R14.2
NetDD1_10: DD1.10 R1_0.1 VD1_0.2 XP1.1 | length 35.9
  Top Layer w0.6: v1(102.25,52.525) 105.85,52.525 107.45,54.125 DD1.10
  Bottom Layer w0.6: v1(102.25,52.525) 102.275,52.5 R1_0.1 123.5,52.5 125.25,54.25 XP1.1
NetDD1_11: DD1.11 R1_1.1 VD1_1.2 XP1.2 | length 28.5
  Top Layer w0.6: v1(104.15,56.9) 104.227,56.977 105.062,56.977 106.7,58.615 DD1.11
  Bottom Layer w0.6: v1(104.15,56.9) 104.258,56.9 105.083,57.725 R1_1.1 108.442,57.737 123.501,57.737 128.288,57.737 XP1.2
NetDD1_12: DD1.12 R1_2.1 VD1_2.2 XP1.3 | length 24.9
  Top Layer w0.6: DD1.12 110.857,59.885 v1(111.753,58.989)
  Bottom Layer w0.6: v1(111.753,58.989) 111.1,59.642 111.1,60.954 111.451,61.306 R1_2.1 116.659,61.306 117.5,60.465 120,60.465 120.75,61.215 VD1_2.2@123.501,61.215 ; VD1_2.2@123.511,61.24 128.29,61.24 XP1.3
NetDD1_13: DD1.13 R1_3.1 VD1_3.2 XP1.4 | length 33.6
  Top Layer w0.6: v1(103.95,59.35) 105.755,61.155 DD1.13
  Bottom Layer w0.6: v1(103.95,59.35) 104.925,59.35 106.3,60.725 106.3,64.05 107.124,64.874 R1_3.1 108.467,64.912 118.577,64.912 VD1_3.2 121.745,64.949 122.5,65.704 124.5,65.704 125.454,64.75 XP1.4
NetDD1_14: DD1.14 R1_4.1 VD1_4.2 XP1.5 | length 33.9
  Top Layer w0.6: v1(103.9,61.15) 103.9,61.242 105.083,62.425 DD1.14
  Bottom Layer w0.6: v1(103.9,61.15) 105.3,62.55 105.3,64.35 107.3,66.35 112.275,66.35 113.294,67.369 R1_4.1 116.659,68.433 117.5,67.591 120,67.591 120.75,68.341 VD1_4.2@123.501,68.341 ; VD1_4.2@123.551,68.304 128.246,68.304 XP1.5
NetDD1_15: DD1.15 R1_5.1 VD1_5.2 XP1.6 | length 35.5
  Top Layer w0.6: v1(103.725,63.685) 103.73,63.69 107.445,63.69 DD1.15
  Bottom Layer w0.6: v1(103.725,63.685) 103.793,63.753 103.793,65.385 105.525,67.117 105.525,70.725 106.654,71.854 R1_5.1 108.467,71.892 118.577,71.892 VD1_5.2 121.745,71.929 122.5,72.684 124.8,72.684 ; 124.816,72.684 125.75,71.75 XP1.6
NetDD1_16: DD1.16 R1_6.1 VD1_6.2 XP1.7 | length 37
  Top Layer w0.6: v1(103.375,67.475) 103.449,67.401 103.449,65.775 104.259,64.965 DD1.16
  Bottom Layer w0.6: v1(103.375,67.475) 103.471,67.475 104.625,68.629 104.625,72.2 105.785,73.36 109.86,73.36 111.841,75.341 R1_6.1 116.659,75.341 117.5,74.5 120,74.5 120.75,75.25 XP1.7
NetDD1_17: DD1.17 R1_7.1 VD1_7.2 XP1.8 | length 39.2
  Top Layer w0.6: v1(103.25,68.95) 103.327,68.873 103.953,68.873 104.875,67.951 104.875,66.81 105.45,66.235 DD1.17
  Bottom Layer w0.6: v1(103.25,68.95) 103.25,74.875 107.045,78.67 R1_7.1 108.467,78.708 118.577,78.708 VD1_7.2 121.745,78.745 122.5,79.5 124.5,79.5 125.25,78.75 XP1.8
NetJ1_2: J1.2 R4.2 | length 10.4
  Top Layer w0.6: J1.2@113.95,81.4 115.5,81.4 116.2,82.1 116.2,85.2 v1(117.6,86.6)
  Bottom Layer w0.6: R4.2@114.85,86.55 117.55,86.55 v1(117.6,86.6)
NetJ2_2: J2.2 R3.1 | length 10.4
  Top Layer w0.6: J2.2@113.95,79.4 115.9,79.4 117.6,81.1 v1(117.6,84.338)
  Bottom Layer w0.6: R3.1@114.85,84.288 117.55,84.288 v1(117.6,84.338)
NetJ3_2: J3.2 R10.2 | length 16.2
  Top Layer w0.3: J3.2 80.784,66.016 v1(83.3,63.5)
  Bottom Layer w0.3: v1(83.3,63.5) 83.372,63.428 83.372,62.428 83.682,62.118 88.318,62.118 89.225,63.025 R10.2
NetJ4_2: J4.2 R11.2 | length 12.4
  Top Layer w0.3: J4.2 80.738,64.162 82.4,62.5 84.211,62.5 84.425,62.714 84.425,62.752 84.983,63.311 v1(84.983,63.5)
  Bottom Layer w0.3: v1(84.983,63.5) 85.009,63.5 85.509,63 87.467,63 R11.2
NetLED1_2: LED1.2 R8.2 | length 5.9
  Top Layer w0.3: LED1.2 88.2,55.3 R8.2
NetR18_2: R18.2 VD8.1 VT1.3 | length 27.2
  Top Layer w0.6: v1(64.9,94.9) 64.907,94.893 64.907,86.214 v1(64.915,86.207)
  Bottom Layer w0.6: R18.2 63.203,86.203 64.911,86.203 v1(64.915,86.207) ; VT1.3 64.45,90.85 64.9,91.3 v1(64.9,94.9) 65.9,95.9 72.9,95.9 73.601,95.199 73.601,93.299 VD8.1
SCL: DD1.1 R13.1 VD5.2 VD7.2 XP2.7 XP2.10 | length 117
  Top Layer w0.3: v1(95.4,68.5) 95.405,68.5 96.4,67.505 DD1.1 99.641,67.505 99.966,67.83 99.966,68.591 v1(100.1,68.725)
  Bottom Layer w0.3: VD7.2 69.481,59.069 70.601,57.949 R13.1@74.525,57.949 ; VD5.2 69.45,64.15 71,62.6 75.7,62.6 78.2,60.1 90.925,60.1 92.2,61.375 92.2,65.3 v1(95.4,68.5) ; R13.1 74.41,57.939 75.299,57.939 75.6,57.639 75.6,54.7 76.3,54 86,54 86.5,53.5 91.8,53.5 93.2,54.9 97.8,54.9 98.425,55.525 98.425,67.05 v1(100.1,68.725)
  Bottom Layer w0.6: XP2.10 59.881,59.069 VD7.2 ; XP2.7 57.772,71.678 62.022,71.678 65.1,68.6 65.1,64.961 65.911,64.15 VD5.2
SDA: DD1.2 R12.1 VD4.2 VD6.2 XP2.8 XP2.11 | length 115.4
  Top Layer w0.3: v1(95.375,66.985) 96.13,66.23 97.945,66.23 97.961,66.246 99.606,66.246 100.161,66.8 v1(100.35,66.8)
  Bottom Layer w0.3: VD6.2@62.321,51.9 R12.1 84.7,51.9 85.7,52.9 97.375,52.9 99.025,54.55 99.025,65.475 v1(100.35,66.8) ; VD4.2 63.275,63.725 64.35,62.65 67.322,62.65 69.372,60.6 74.4,60.6 76.9,58.1 92.1,58.1 92.775,58.775 92.775,64.385 v1(95.375,66.985)
  Bottom Layer w0.6: XP2.11 60.5,54.95 60.5,52.525 61.125,51.9 VD6.2@62.321,51.9 ; XP2.8 61.25,68.25 62.35,67.15 VD4.2
STRONG_Vout: C3.2 C4.1 L1.1 R2.2 XP1.11 XP1.12 | length 53.7
  Top Layer w2: L1.1 92.175,76.014 96.114,76.014 99.175,79.075 103.1,83 103.1,91.9 104.95,93.75 C4.1 110.4,93.75 112.7,93.75 113.95,95 120.7,95 122.95,92.75 XP1.12 XP1.11
  other v3: 110.4,93.675
Vin: VT1.1 VT1.2 VT1.5 VT1.6 XP2.1 XP2.2 | length 7
  Top Layer w2: XP2.2 XP2.1
  Bottom Layer w2: XP2.2 XP2.1
  other v1: 59.7,92.3 59.7,93.4 60.4,94.4 61.5,94.4 62.6,94.4
WEAK_Vout: C6.1 C9.2 C10.2 DD1.6 DD1.18 L2.1 R1_0.2 R1_1.2 R1_2.2 R1_3.2 R1_4.2 R1_5.2 R1_6.2 R1_7.2 R6.2 R7.2 R8.1 R12.2 R13.2 R14.1 R15.1 R16.1 R17.1 | length 192.7
  Top Layer w0.3: v1(72.45,55.225) 72.45,57.55 72.9,58 R17.1 78.128,58 78.203,57.925 85.4,57.925 85.983,58.508 v1(85.983,66.982) v1@85.99,66.974 ; v1@87.226,66.974 v1(87.233,66.967) 87.233,65.067 88.2,64.1 R8.1 ; DD1.6 97.962,61.167 99.367,61.167 99.83,61.63 v3(100.847,61.63) 100.847,65.347 101.5,66 101.5,69.375 100.575,70.3 100.575,71.409 v1@100.534,71.45
  Top Layer w0.6: v1(100.5,73) v1@100.601,73 ; v1@100.513,71.471 v1(100.525,71.458) ; DD1.18 107.452,67.502 110.248,67.502 110.25,67.5 C9.2@110.25,69.662
  Top Layer w1: v1(87.233,66.967) 87.247,66.982 88.882,66.982 93.35,71.45 100.534,71.45 105.425,71.45 107.213,69.662 C9.2@110.25,69.662 ; v1@100.513,71.471 100.5,71.484 v1(100.5,73) 100.5,75 103.4,77.9 115.098,77.9 v1(115.635,77.363) ; v1(110.5,55.7) 111.7,55.7 115.7,59.7 v1(115.7,63.3) v1(115.7,70.4) v1@115.7,77.298
  Top Layer w1.2: v1@85.99,66.974 v1@87.226,66.974 ; 98.97,71.641 100.329,73 v1(100.5,73) ; v1@100.601,73 102.033,71.568
  Top Layer w2: v1(67.1,76.2) 67.105,76.205 v1(67.105,77.874) 67.105,80.155 67.15,80.2 L2.1@67.15,83.3
  Bottom Layer w0.3: v1(72.45,55.225) 72.45,54.35 72.9,53.9 R12.2 R13.2
  Bottom Layer w1: v1@67.105,76.205 67.105,70.895 71.045,66.955 C6.1 R7.2 R6.2@79.813,66.955 ; R6.2 v1@85.945,66.943 ; v1(85.983,66.982) v1@85.997,66.967 ; R1_0.2 106.075,54.5 107.3,55.725 110.475,55.725 v1(110.5,55.7) ; R1_5.2 110.363,69.854 110.941,70.433 115.667,70.433 v1(115.7,70.4) ; R1_7.2 110.27,76.67 110.941,77.341 115.613,77.341 v1(115.635,77.363) ; R1_3.2@108.555,62.874 110.974,62.874 111.406,63.306 115.694,63.306 v1(115.7,63.3)
  Bottom Layer w1.2: v1@85.997,66.967 v1(87.233,66.967)
  Bottom Layer w2: v1(67.1,76.2) 67.1,77.869 v1(67.105,77.874)
pads on no net: DA1. DA2. DD1.7 DD1.32 VD3. VD8. VT1.7 XP2.5 XP2.6

## Polygon pours and split planes (outlines as drawn)
GND on Top Layer "GND_L01_P000" (solid, remove dead copper, pour order 0): 53,52 ccw(c55,52) 55,50 86,50 88,52 98,52 100,50 131,50 ccw(c131,52) 133,52 133,95 ccw(c131,95) 131,97 100,97 98,95 88,95 86,97 55,97 ccw(c55,95) 53,95
GND on Bottom Layer "GND_L02_P001" (solid, remove dead copper, pour order 1): 53,52 ccw(c55,52) 55,50 86,50 88,52 98,52 100,50 131,50 ccw(c131,52) 133,52 133,95 ccw(c131,95) 131,97 100,97 98,95 88,95 86,97 55,97 ccw(c55,95) 53,95

## Other copper
Top Layer:
  rectangle net Vin: 56.5,91.6 64.1,93.9
  rectangle net NetDA1_2: 81,87.3 83.5,90.7
  region net Vin: 64.083,93.91 64.083,93.899 64.093,93.89 64.085,93.882 58.903,93.882 58.903,93.894 58.924,93.914
  region net Vin: 64.1,93.9 62.9,95 60.1,95 58.9,93.9
Bottom Layer:
  rectangle net Vin: 56.5,91.5 64.1,93.9
  region net NetC1_1: 61.752,91.148 61.8,91.1 61.8,90.2 62.2,89.8 61.9,89.5 61.9,88.3 61.4,88.3 61,87.9 60.1,87.9 59.8,88.2 59.8,91.1 59.849,91.149 60.127,91.149
  region net Vin: 64.083,93.91 64.083,93.899 64.093,93.89 64.085,93.882 58.903,93.882 58.903,93.894 58.924,93.914
  region net Vin: 64.083,93.91 64.083,93.899 64.093,93.89 64.085,93.882 58.903,93.882 58.903,93.894 58.924,93.914
  region net Vin: 64.1,93.9 62.9,95 60.1,95 58.9,93.9

## Silkscreen, mask and mechanical layers (free items; w line width, h text height)
Top Overlay:
  circle w0.45: c87,53.5 r0.15
  text "12-24V" at 60.45,94.85 h1.2
  text "Vout" at 120.75,92.25 h1.5
  text "Vin" at 60.5,92 h1.5
  text "Vout" at 120.75,88.75 h1.5
  text "Vin" at 60.5,88.5 h1.5
  text "GND" at 60.5,85 h1.5
  text "GND" at 121.75,85 h1.5
  text "Vout:" at 104.5,82.675 h1.5
  text "GND" at 60.5,81.5 h1.5
  text "GND" at 121.75,81.475 h1.5
  text "3.3V / 5V" at 106.025,78.7 h1.1
  text "m" at 102.4,72.1 h5.2
  text "SCL" at 59.875,70.5 h1.5
  text "Vio:" at 68.2,67.7 h1.5
  text "SDA" at 59.875,67 h1.5
  text "GND" at 59.875,63.5 h1.5
  text "3.3V / 5V" at 68.55,63.3 h1.1
  text "IN/OUT" at 121.575,61 h2 r90
  text "SCL" at 59.875,60 h1.5
  text "A0  A1  A2" at 73.1,59.596 h1.1
  text "SDA" at 59.875,56.45 h1.5
  text "GPIO expanderV2" at 96,53.9 h1
  text "GND" at 59.875,53 h1.5
  text "7 / 6 / 5 / 4 / 3 / 2 / 1 / 0" at 122.775,52.873 h2.1
  text "designed by CtrlNLab" at 96,51.938 h1
  text "1 /  / 0" at 84.15,51.8 h1.2
  text "Russia, Moscow 2022" at 99.9,50.014 h1
Mechanical 1:
  lines w0.1: 51.575,73.5 93,73.5 134.425,73.5
  lines w0.254: 49.575,73.5 51.575,73.5 ; 134.425,73.5 136.425,73.5
Board outline:
  the board outline again, w0.254
Drill Drawing:
  circle w0.254: c118,92 r2.7
  circle w0.254: c68,92 r2.7
  circle w0.254: c68,55 r2.7
  circle w0.254: c118,55 r2.7
  lines w0.254: 49.5,48 49.5,102 93,102 136.5,102 136.5,48 ; 53,73.5 133,73.5 ; 54.995,50 55,97 ; 73.6,50 73.6,73.5 73.6,97 ; 93,95 93,73.5 93,52 93,142 ; 112.4,50 112.4,73.5 112.4,97 ; 131,51 131,96